# Altium PCB THEIA3000 LIGHTING BOARD V2.PcbDoc (part 2 of 2)
Units mil, origin at the board's own origin, x right, y up, seen from the top; angles counter-clockwise.
Board outline 10669.29 x 4271.65 mil, 2 copper layers (Top Layer, Bottom Layer); 147 components, 96 nets, 386 pads, 52 vias.
Unrouted connection lines stored in the file: 10.
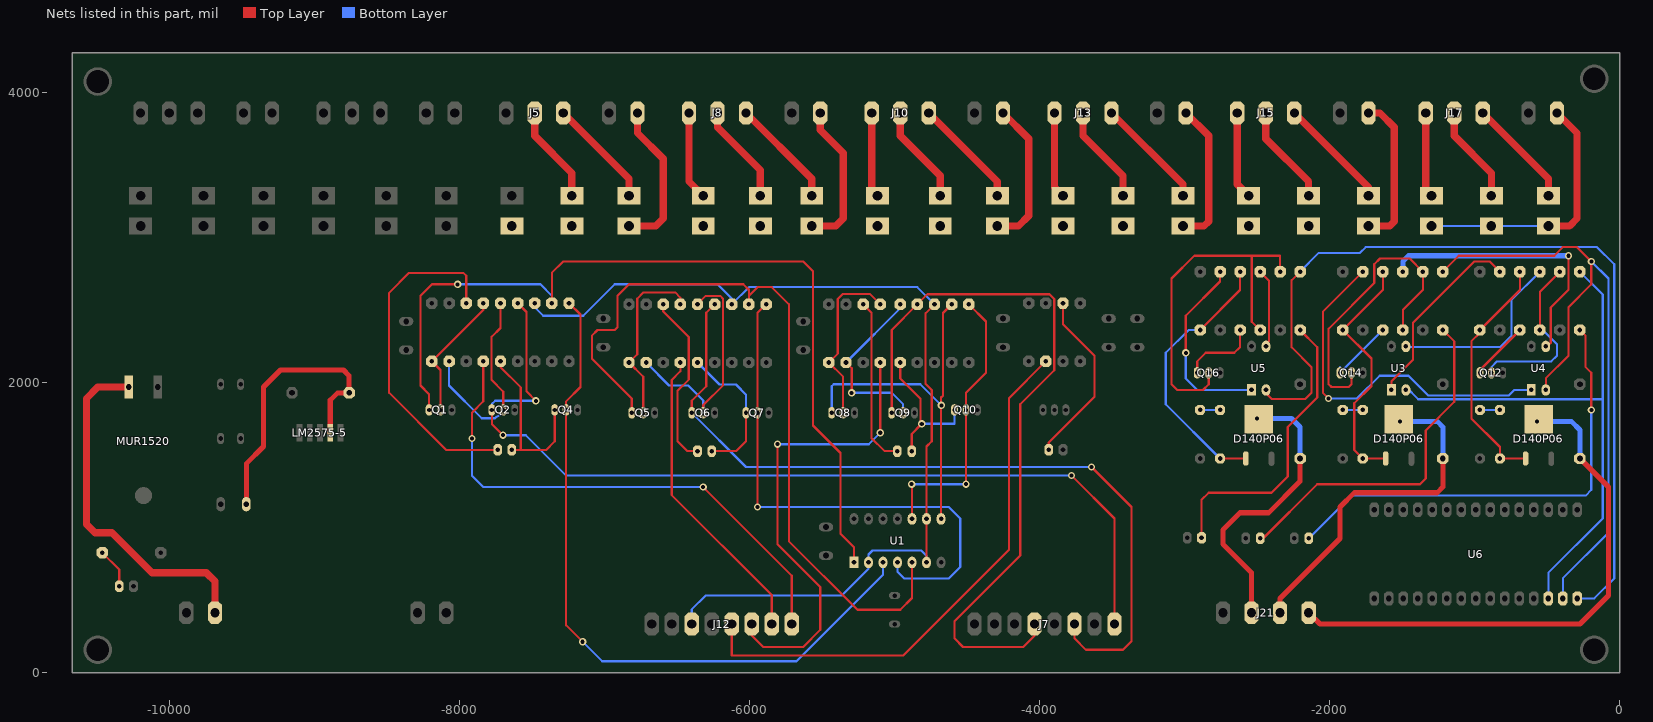
[diagram p2: the nets of this part, all layers, seen from the top]

## Via types
v1: diameter 50, hole 28, Top Layer to Bottom Layer, 52 vias

## Nets (pads, with @x,y where several pads share a name; then routed paths per layer and width w, separated by ;. In a path a pad name is that pad's centre, name@x,y a point inside that pad or via, vN(x,y) a via of type N, cw(c..) or ccw(c..) an arc to the next point about the centre after c; other vN are vias at no path point) (continued)
NetD7_3: D7.3 D8.3 D9.3 J6.2 | length 1059.2
  Top Layer w50: D9.3@-6830.71,3078.74 -6645.67,3078.74 -6594.49,3129.92 -6594.49,3543.31 -6771.65,3720.47 J6.2@-6771.65,3858.27
NetD8_1: D8.1 J5.2 | length 676.9
  Top Layer w50: J5.2@-7480.32,3858.27 -7480.32,3700.79 -7224.41,3444.88 D8.1@-7224.41,3287.4
NetD9_1: D9.1 J5.3 | length 758.4
  Top Layer w50: J5.3@-7283.47,3858.27 -6830.71,3405.51 D9.1@-6830.71,3287.4
NetD10_1: D10.1 J8.2 | length 693.2
  Top Layer w50: J8.2@-6220.47,3858.27 -6220.47,3759.84 -5925.2,3464.57 D10.1@-5925.2,3287.4
NetD10_3: D10.3 D11.3 D12.3 J9.2 | length 1031.3
  Top Layer w50: D12.3@-5570.87,3078.74 -5405.51,3078.74 -5354.33,3129.92 -5354.33,3582.68 -5511.81,3740.16 J9.2@-5511.81,3858.27
NetD11_1: D11.1 J8.1 | length 611.6
  Top Layer w50: J8.1@-6417.32,3858.27 -6417.32,3385.83 D11.1@-6318.9,3287.4
NetD12_1: D12.1 J8.3 | length 758.4
  Top Layer w50: J8.3@-6023.62,3858.27 -5570.87,3405.51 D12.1@-5570.87,3287.4
NetD13_1: D13.1 J10.2 | length 685
  Top Layer w50: J10.2@-4960.63,3858.27 -4960.63,3700.79 -4685.04,3425.2 D13.1@-4685.04,3287.4
NetD13_3: D13.3 D14.3 D15.3 J11.2 | length 1027.9
  Top Layer w50: D15.3@-4291.34,3078.74 -4145.67,3078.74 -4074.8,3149.61 -4074.8,3681.1 J11.2@-4251.97,3858.27
NetD14_1: D14.1 J10.1 | length 587.2
  Top Layer w50: J10.1@-5157.48,3858.27 -5157.48,3326.77 D14.1@-5118.11,3287.4
NetD15_1: D15.1 J10.3 | length 766.6
  Top Layer w50: J10.3@-4763.78,3858.27 -4291.34,3385.83 D15.1@-4291.34,3287.4
NetD16_1: D16.1 J13.1 | length 595.3
  Top Layer w50: J13.1@-3897.64,3858.27 -3897.64,3346.46 D16.1@-3838.58,3287.4
NetD16_3: D16.3 D17.3 D18.3 J14.2 | length 1003.5
  Top Layer w50: D18.3@-3011.81,3078.74 -2866.14,3078.74 -2834.65,3110.24 -2834.65,3700.79 J14.2@-2992.13,3858.27
NetD17_1: D17.1 J13.2 | length 685
  Top Layer w50: J13.2@-3700.79,3858.27 -3700.79,3700.79 -3425.2,3425.2 D17.1@-3425.2,3287.4
NetD18_1: D18.1 J13.3 | length 774.7
  Top Layer w50: J13.3@-3503.94,3858.27 -3011.81,3366.14 D18.1@-3011.81,3287.4
NetD19_1: D19.1 J15.2 | length 693.2
  Top Layer w50: J15.2@-2440.95,3858.27 -2440.95,3681.1 -2145.67,3385.83 D19.1@-2145.67,3287.4
NetD19_3: D19.3 D20.3 D21.3 J16.2 | length 1057.8
  Top Layer w50: D21.3@-1732.28,3078.74 -1586.61,3078.74 -1555.12,3110.24 -1555.12,3759.84 -1653.55,3858.27 J16.2@-1732.28,3858.27
NetD20_1: D20.1 J15.1 | length 603.5
  Top Layer w50: J15.1@-2637.8,3858.27 -2637.8,3366.14 D20.1@-2559.06,3287.4
NetD21_1: D21.1 J15.3 | length 782.9
  Top Layer w50: J15.3@-2244.1,3858.27 -1732.28,3346.46 D21.1@-1732.28,3287.4
NetD22_1: D22.1 J17.2 | length 676.9
  Top Layer w50: J17.2@-1141.73,3858.27 -1141.73,3700.79 -885.83,3444.88 D22.1@-885.83,3287.4
NetD22_3: D22.3 D23.3 D24.3 J18.2 | length 1810.6
  Top Layer w50: D24.3@-492.13,3078.74 -346.46,3078.74 -295.28,3129.92 -295.28,3720.47 J18.2@-433.07,3858.27
  Bottom Layer w15: D23.3@-1299.21,3078.74 D22.3@-885.83,3078.74 D24.3@-492.13,3078.74
NetD23_1: D23.1 J17.1 | length 587.2
  Top Layer w50: J17.1@-1338.58,3858.27 -1338.58,3326.77 D23.1@-1299.21,3287.4
NetD24_1: D24.1 J17.3 | length 758.4
  Top Layer w50: J17.3@-944.88,3858.27 -492.13,3405.51 D24.1@-492.13,3287.4
NetD25_3: J19.1 MUR1520.3 | length 2455.5
  Top Layer w50: MUR1520.3@-10279.53,1968.5 -10492.13,1968.5 -10570.87,1889.76 -10570.87,1023.62 -10511.81,964.57 -10393.7,964.57 -10118.11,688.98 -9744.09,688.98 -9685.04,629.92 J19.1@-9685.04,413.39
NetD26_2: 1N5819.2 330UH.2 LM2575-5.2 | length 2005.4
  Top Layer w35: 330UH.2@-9468.5,1161.42 -9468.5,1440.14 -9350.39,1558.25 -9350.39,1968.5 -9232.28,2086.61 -8799.21,2086.61 -8759.84,2047.24 1N5819.2@-8759.84,1929.13 -8838.58,1929.13 -8889.76,1877.95 LM2575-5.2@-8889.76,1653.54
NetD27_2: 1N4148.2@-964.57,1811.02 1N5245.2@-826.77,1811.02 | length 137.8
  Bottom Layer w15: 1N4148.2@-964.57,1811.02 1N5245.2@-826.77,1811.02
NetD28_2: D140P06.2@-560.04,1748.03 J21.1@-2145.67,413.39 UF4007.2@-275.59,1476.38 | length 3724.1
  Top Layer w35: J21.1@-2145.67,413.39 -2066.93,334.65 -275.59,334.65 -78.74,531.5 -78.74,1279.53 UF4007.2@-275.59,1476.38
  Bottom Layer w35: v1(-570.87,1732.28) -334.65,1732.28 -275.59,1673.23 UF4007.2@-275.59,1476.38
NetD29_2: 1N4148.2@-1909.45,1811.02 1N5245.2@-1771.65,1811.02 | length 137.8
  Bottom Layer w15: 1N4148.2@-1909.45,1811.02 1N5245.2@-1771.65,1811.02
NetD30_2: D140P06.2@-1524.61,1748.03 J21.2@-2342.52,413.39 UF4007.2@-1220.47,1476.38 | length 2390.3
  Top Layer w35: J21.2@-2342.52,413.39 -2342.52,511.81 -1929.13,925.2 -1929.13,1141.73 -1830.71,1240.16 -1259.84,1240.16 -1220.47,1279.53 UF4007.2@-1220.47,1476.38
  Bottom Layer w35: v1(-1515.75,1732.28) -1259.84,1732.28 -1220.47,1692.91 UF4007.2@-1220.47,1476.38
NetD31_2: 1N4148.2@-2893.7,1811.02 1N5245.2@-2755.91,1811.02 | length 137.8
  Bottom Layer w15: 1N4148.2@-2893.7,1811.02 1N5245.2@-2755.91,1811.02
NetD32_2: D140P06.2@-2489.17,1748.03 J21.3 UF4007.2@-2204.72,1476.38 | length 2019.1
  Top Layer w35: J21.3@-2539.37,413.39 -2539.37,688.98 -2736.22,885.83 -2736.22,984.25 -2618.11,1102.36 -2421.26,1102.36 -2204.72,1318.9 UF4007.2@-2204.72,1476.38 UF4007.2@-2206.69,1474.41
  Bottom Layer w35: v1(-2500,1751.97) -2263.78,1751.97 -2204.72,1692.91 UF4007.2@-2204.72,1476.38
NetJ7_1: 5.6K.2@-7598.43,2547.24 J7.1 Q2.1 | length 6464.8
  Top Layer w15: Q2.1@-7775.59,1811.02 -7775.59,1714.11 v1(-7698.54,1637.06) ; 5.6K.2@-7598.43,2547.24 -7537.54,2486.36 -7537.54,1939.06 v1(-7472.54,1874.06) ; v1(-3779.53,1358.27) -3484.25,1062.99 J7.1@-3484.25,334.65
  Bottom Layer w15: Q2.1@-7775.59,1811.02 -7775.59,1852.02 -7753.54,1874.06 v1(-7472.54,1874.06) ; v1(-7698.54,1637.06) -7542.58,1637.06 -7263.78,1358.27 v1(-3779.53,1358.27)
NetJ7_3: 5.6K.2@-6240.16,2539.37 J7.3 Q6.1 | length 5616.1
  Top Layer w15: Q6.1@-6397.64,1803.15 -6397.64,1874.56 -6298.54,1973.66 -6298.54,2480.98 5.6K.2@-6240.16,2539.37 ; J7.3@-3779.53,354.33 J7.3@-3759.84,334.65 -3759.84,236.22 -3681.1,157.48 -3425.2,157.48 -3366.14,216.54 -3366.14,1141.73 v1(-3641.73,1417.32)
  Bottom Layer w15: Q6.1@-6397.64,1803.15 Q6.1@-6397.64,1791.34 -6023.62,1417.32 v1(-3641.73,1417.32)
NetJ7_5: 5.6K.2@-4842.52,2539.37 J7.5 Q9.1 | length 5106.9
  Top Layer w15: Q9.1@-5019.69,1803.15 -5019.69,2362.2 5.6K.2@-4842.52,2539.37 -4773.83,2608.06 -3931.54,2608.06 -3899.54,2576.06 -3899.54,2084.71 -4133.86,1850.39 -4133.86,807.09 -4586.61,354.33 -4586.61,236.22 -4527.56,177.17 -4112.24,177.17 -4035.43,253.97 J7.5@-4035.43,334.65
NetJ12_1: 220.1@-7834.65,2145.67 J12.1 | length 3672.3
  Top Layer w15: v1(-7913.39,1614.17) -7913.39,1791.34 -7834.65,1870.08 220.1@-7834.65,2145.67 ; v1@-6319.45,1278.97 -5708.66,668.18 J12.1@-5708.66,334.65
  Bottom Layer w15: v1(-7913.39,1614.17) -7913.39,1358.27 -7834.65,1279.53 v1(-6318.9,1279.53) ; v1(-6318.9,1279.53) -6299.21,1259.87
NetJ12_2: 220.1@-6476.38,2137.8 J12.2 | length 2113
  Top Layer w15: 220.1@-6476.38,2137.8 -6476.38,2076.85 -6535.43,2017.8 -6535.43,1223.95 -5846.46,534.98 J12.2@-5846.46,334.65
NetJ12_3: 220.1@-5098.43,2137.8 J12.3 | length 3260.1
  Top Layer w15: J12.3@-5984.25,334.65 -5984.25,255.9 -5905.51,177.17 -5629.92,177.17 -5511.81,295.28 -5511.81,590.55 -5807.09,885.83 v1(-5807.09,1574.8) ; v1(-5098.43,1653.54) -5098.43,1777.95 220.1@-5098.43,2137.8
  Bottom Layer w15: v1(-5807.09,1574.8) -5177.17,1574.8 v1(-5098.43,1653.54)
NetJ12_4: 220.1@-3956.69,2145.67 J12.4 | length 3833.1
  Top Layer w15: J12.4@-6122.05,334.65 -6122.05,118.11 -4940.5,118.11 -4211.54,847.06 -4211.54,1890.82 220.1@-3956.69,2145.67
NetJ12_6: 100K.2 J12.6 U1.2 U1.6 U1.9 | length 6918.3
  Top Layer w15: U1.6@-4779.53,759.84 U1.9@-4779.53,1059.84 -4779.53,1559.06 -4744.09,1594.49 -4744.09,1948.82 -4785.54,1990.27 -4785.54,2478.24 100K.2@-4724.41,2539.37
  Bottom Layer w15: 100K.2@-7480.32,2547.24 -7480.32,2519.69 -7421.26,2460.63 -7145.67,2460.63 -6929.13,2677.17 -6220.47,2677.17 -6122.05,2578.74 100K.2@-6122.05,2539.37 -6003.94,2657.48 -4842.52,2657.48 100K.2@-4724.41,2539.37 ; J12.6@-6397.64,334.65 -6397.64,436.06 -6302.2,531.5 -5364.09,531.5 -5179.53,716.06 U1.2@-5179.53,759.84 -5179.53,814.22 -5152.03,841.72 -4815.18,841.72 -4779.53,806.06 U1.6@-4779.53,759.84
NetLED1_A: 220.2@-7952.76,2547.24 "STROBE OUT1.A" | length 2386
  Top Layer w15: 220.2@-7952.76,2547.24 -7952.76,2736.22 -7972.44,2755.91 -8346.46,2755.91 -8484.25,2618.11 -8484.25,1928.77 -8090.91,1535.43 -7736.22,1535.43
NetLED1_K: 220.1@-7716.54,2145.67 "STROBE OUT1.K" Q4.1 | length 1264.5
  Top Layer w15: 220.1@-7716.54,2145.67 -7716.54,2106.3 -7576.54,1966.31 -7576.54,1537.63 -7578.74,1535.43 -7637.8,1535.43 -7401.57,1535.43 -7342.52,1594.49 Q4.1@-7342.52,1811.02
NetLED2_A: 2.2K.2 "HW TRIG OUT.A" | length 1232
  Top Layer w15: -3937.01,1535.43 -3937.01,1586.14 -3622.05,1901.1 -3622.05,2185.04 -3838.58,2401.58 2.2K.2@-3838.58,2547.24
NetLED3_A: 220.2@-6594.49,2539.37 "STROBE OUT2.A" | length 1215.4
  Top Layer w15: 220.2@-6594.49,2539.37 -6594.49,2489.75 -6418.54,2313.8 -6418.54,2020.06 -6496.06,1942.54 -6496.06,1594.49 -6429.13,1527.56 -6358.27,1527.56
NetLED3_K: 220.1@-6358.27,2137.8 "STROBE OUT2.K" Q7.1 | length 1011.8
  Top Layer w15: -6259.84,1527.56 -6259.84,1527.06 -6092.62,1527.06 -6023.62,1596.06 Q7.1@-6023.62,1803.15
  Bottom Layer w15: 220.1@-6358.27,2137.8 -6206.54,1986.06 -6093.54,1986.06 -6023.62,1916.14 Q7.1@-6023.62,1803.15
NetLED4_A: 220.2@-5216.54,2539.37 "STROBE OUT3.A" | length 1162.3
  Top Layer w15: 220.2@-5216.54,2539.37 -5159.54,2482.38 -5159.54,1618.06 -5068.54,1527.06 -4980.32,1527.06 -4980.32,1527.56
NetLED4_K: 220.1@-4960.63,2137.8 "STROBE OUT3.K" Q10.1 | length 1105.8
  Top Layer w15: 220.1@-4960.63,2137.8 -4960.63,2027.56 -4820.54,1887.47 -4820.54,1707.06 -4881.89,1645.72 ; -4881.89,1527.56 -4881.89,1645.72 ; v1(-4812.54,1715.06) -4881.89,1645.72
  Bottom Layer w15: v1(-4812.54,1715.06) -4812.54,1716.06 -4586.61,1716.06 Q10.1@-4586.61,1803.15
NetLED5_A: 680.2@-10460.63,826.77 LED5.A | length 279.4
  Top Layer w15: 680.2@-10460.63,826.77 -10344.49,710.63 LED5.A@-10344.49,595.47
NetLED6_K: 330.1@-275.59,2362.2 RED.K | length 3231.2
  Top Layer w15: 330.1@-275.59,2362.2 -236.22,2322.83 -236.22,2106.3 -196.85,2066.93 v1@-196.85,1802.27
  Bottom Layer w15: RED.K@-2145.67,925.2 -1850.39,1220.47 -236.22,1220.47 -196.85,1259.84 v1(-196.85,1811.02)
NetLED7_K: 330.1@-1220.47,2362.2 GRN.K | length 2450.7
  Top Layer w15: GRN.K@-2480.31,925.2 -2460.63,925.2 -2086.61,1299.21 -1377.95,1299.21 -1338.58,1338.58 -1338.58,1669.76 -1141.73,1866.61 -1141.73,2283.46 330.1@-1220.47,2362.2
NetLED8_K: 330.1@-2204.72,2362.2 YEL.K | length 2064.9
  Top Layer w15: YEL.K@-2883.86,930.12 -2883.86,1190.95 -2834.65,1240.16 -2401.57,1240.16 -2289.84,1351.89 -2289.84,1692.91 -2086.61,1896.14 -2086.61,2244.09 330.1@-2204.72,2362.2
NetQ1_2: 5.6K.1@-8188.98,2145.67 220.2@-7834.65,2547.24 Q1.2 | length 907.5
  Top Layer w15: Q1.2@-8129.92,1811.02 -8129.92,2086.61 5.6K.1@-8188.98,2145.67 -7834.65,2500 220.2@-7834.65,2547.24
NetQ1_3: 5.6K.2@-7362.21,2547.24 Q1.1 U1.1 | length 6027.3
  Top Layer w15: Q1.1@-8208.66,1811.02 -8208.66,1920.18 -8267.72,1979.24 -8267.72,2598.43 -8188.98,2677.17 v1(-8011.81,2677.17) ; 5.6K.2@-7362.21,2547.24 -7362.21,2755.9 -7283.46,2834.65 -5629.92,2834.65 -5562.54,2767.27 -5562.54,1704.28 -5372.54,1514.28 -5372.54,957.08 -5279.53,864.06 U1.1@-5279.53,759.84
  Bottom Layer w15: v1(-8011.81,2677.17) -7440.94,2677.17 -7362.21,2598.43 5.6K.2@-7362.21,2547.24
NetQ2_2: 5.6K.1@-8070.87,2145.67 220.2@-7716.54,2547.24 Q2.2 | length 1460.3
  Top Layer w15: 220.2@-7716.54,2547.24 -7716.54,2376.07 -7777.54,2315.06 -7777.54,2017.76 -7696.85,1937.06 Q2.2@-7696.85,1811.02
  Bottom Layer w15: 5.6K.1@-8070.87,2145.67 -8070.87,1979.06 -7845.95,1754.15 -7755.46,1754.15 -7696.85,1789.06 Q2.2@-7696.85,1811.02
NetQ4_2: 47K.2@-7244.1,2547.24 Q4.2 U1.3 | length 4912.3
  Top Layer w15: 47K.2@-7244.1,2547.24 -7165.35,2468.5 -7165.35,1968.5 -7263.78,1870.08 Q4.2@-7263.78,1811.02 -7263.78,327.3 v1(-7149.54,213.06)
  Bottom Layer w15: v1(-7149.54,213.06) -7015.22,78.74 -5675.91,78.74 -5079.53,675.13 U1.3@-5079.53,759.84
NetQ5_2: 5.6K.1@-6830.71,2137.8 220.2@-6476.38,2539.37 Q5.2 | length 1215.1
  Top Layer w15: Q5.2@-6732.28,1803.15 -6732.28,2039.37 5.6K.1@-6830.71,2137.8 -6773.54,2194.96 -6773.54,2578.06 -6730.37,2621.24 -6512.62,2621.24 -6476.38,2585 220.2@-6476.38,2539.37
NetQ5_3: 5.6K.2@-6003.94,2539.37 Q5.1 U1.5 | length 5411.5
  Top Layer w15: Q5.1@-6811.02,1803.15 -6811.02,1889.76 -7086.61,2165.35 -7086.61,2322.83 -7047.24,2362.2 -6929.13,2362.2 -6909.45,2381.89 -6909.45,2598.43 -6830.71,2677.17 -6043.31,2677.17 -6003.94,2637.8 -6003.94,2598.42 ; 5.6K.2@-6003.94,2539.37 -6003.94,2598.42 ; U1.5@-4879.53,759.84 -4879.53,514.17 -4960.63,433.07 -5255.91,433.07 -5728.35,905.51 -5728.35,2539.37 -5846.46,2657.48 -5944.88,2657.48 -6003.94,2598.42
NetQ6_2: 5.6K.1@-6712.64,2137.79 220.2@-6358.27,2539.37 Q6.2 | length 1614.2
  Top Layer w15: 220.2@-6358.27,2539.37 -6300.57,2597.06 -6202.54,2597.06 -6181.54,2576.06 -6181.54,1982.06 -6318.9,1844.71 Q6.2@-6318.9,1803.15
  Bottom Layer w15: 5.6K.1@-6712.64,2137.79 -6554.41,1979.56 -6422.4,1979.56 -6318.9,1876.06 Q6.2@-6318.9,1803.15
NetQ7_2: 47K.2@-5885.83,2539.37 Q7.2 U1.4 | length 3736
  Top Layer w15: v1(-5944.88,1141.73) -5944.88,2480.32 47K.2@-5885.83,2539.37
  Bottom Layer w15: v1(-5944.88,1141.73) -4625.98,1141.73 -4547.24,1062.99 -4547.24,728.35 -4626.53,649.06 -4933.54,649.06 -4979.53,695.05 U1.4@-4979.53,759.84
NetQ8_2: 5.6K.1@-5452.76,2137.8 220.2@-5098.43,2539.37 Q8.2 | length 1174.7
  Top Layer w15: Q8.2@-5354.33,1803.15 -5354.33,2039.37 5.6K.1@-5452.76,2137.8 -5391.54,2199.01 -5391.54,2576.06 -5358.54,2609.06 -5168.12,2609.06 220.2@-5098.43,2539.37
NetQ8_3: 5.6K.2@-4606.3,2539.37 Q8.1 U1.8 | length 2505.3
  Top Layer w15: U1.8@-4679.53,1059.84 v1@-4679.53,1841.08 ; v1(-4677.54,1843.06) v1@-4679.53,1841.08 ; 5.6K.2@-4606.3,2539.37 -4666.54,2479.13 -4666.54,1909.06 -4679.53,1896.08 v1@-4679.53,1841.08
  Bottom Layer w15: Q8.1@-5433.07,1803.15 -5433.07,1974.54 -5419.42,1988.19 -4822.67,1988.19 v1(-4677.54,1843.06)
NetQ9_2: 5.6K.1@-5334.65,2137.8 220.2@-4960.63,2539.37 Q9.2 | length 1227.1
  Top Layer w15: 5.6K.1@-5334.65,2137.8 -5295.28,2098.43 v1(-5295.28,1929.13)
  Bottom Layer w15: 5.6K.1@-5334.65,2137.8 220.2@-4933.07,2539.37 ; v1(-5295.28,1929.13) -5019.68,1929.13 -4940.95,1850.39 Q9.2@-4940.95,1803.15
NetQ10_2: 47K.2@-4488.21,2539.37 Q10.2 U1.10 | length 1966.7
  Top Layer w15: v1(-4881.89,1299.21) -4872.05,1289.37 -4879.53,1281.89 U1.10@-4879.53,1059.84 ; v1(-4507.87,1299.21) -4507.87,1929.13 -4370.08,2066.93 -4370.08,2421.23 47K.2@-4488.21,2539.37
  Bottom Layer w15: v1(-4881.89,1299.21) v1(-4507.87,1299.21)
NetQ11_1: 1N5245.1@-826.77,1476.38 4.7K.1@-964.57,2362.2 680.2@-688.98,2763.78 D140P06.1@-649.61,1476.38 | length 1665
  Top Layer w15: 4.7K.1@-964.57,2342.52 -1023.62,2283.46 -1023.62,1751.97 -826.77,1555.12 1N5245.1@-826.77,1476.38 D140P06.1@-649.61,1476.38 ; 4.7K.1@-964.57,2362.2 -688.98,2637.8 680.2@-688.98,2763.78
NetQ12_1: 4.7K.1@-551.18,2362.2 22K.2@-413.39,2763.78 Q12.2 | length 1221
  Top Layer w15: 4.7K.1@-551.18,2362.2 -551.18,2625.98 22K.2@-413.39,2763.78
  Bottom Layer w15: Q12.2@-885.83,2066.93 -885.83,2106.3 -846.46,2145.67 -472.44,2145.67 -433.07,2185.04 -433.07,2263.78 -531.5,2362.2 4.7K.1@-551.18,2362.2
NetQ12_2: 680.1@-688.98,2362.2 Q12.1 | length 389.7
  Top Layer w15: Q12.1@-964.57,2086.61 680.1@-688.98,2362.2
NetQ13_1: 1N5245.1@-1771.65,1476.38 4.7K.1@-1909.45,2362.2 680.2@-1633.86,2763.78 D140P06.1@-1614.17,1476.38 | length 1714
  Top Layer w15: 680.2@-1633.86,2763.78 -1633.86,2637.8 4.7K.1@-1909.45,2362.2 -1712.6,2165.35 -1712.6,1975.96 -1830.71,1857.85 -1830.71,1535.43 1N5245.1@-1771.65,1476.38 D140P06.1@-1614.17,1476.38
NetQ14_1: 4.7K.1@-1496.06,2362.2 22K.2@-1358.27,2763.78 Q14.2 | length 2056.9
  Top Layer w15: Q14.2@-1850.39,2066.93 -1850.39,1988.19 -1870.08,1968.5 -1988.19,1968.5 -2007.87,1988.19 -2007.87,2371.27 -1692.91,2686.23 -1692.91,2814.96 -1653.54,2854.33 -1448.82,2854.33 22K.2@-1358.27,2763.78 -1358.27,2637.8 -1496.06,2500 4.7K.1@-1496.06,2362.2
NetQ14_2: 680.1@-1633.86,2362.2 Q14.1 | length 457
  Bottom Layer w15: Q14.1@-1929.13,2106.3 Q14.1@-1929.13,2066.93 680.1@-1633.86,2362.2
NetQ15_1: 1N5245.1@-2755.91,1476.38 4.7K.1@-2893.7,2362.2 680.2@-2618.11,2763.78 D140P06.1@-2578.74,1476.38 | length 1877.6
  Top Layer w15: 4.7K.1@-2893.7,2362.2 -2618.11,2637.8 680.2@-2618.11,2763.78 ; 1N5245.1@-2755.91,1476.38 D140P06.1@-2578.74,1476.38
  Bottom Layer w15: 4.7K.1@-2893.7,2362.2 -2972.44,2362.2 -3129.92,2204.72 -3129.92,1850.39 1N5245.1@-2755.91,1476.38
NetQ16_1: 4.7K.1@-2480.32,2362.2 22K.2@-2342.52,2763.78 Q16.2 | length 2551.2
  Top Layer w15: Q16.2@-2834.65,2066.93 -2834.65,1988.19 -2874.02,1948.82 -3051.18,1948.82 -3090.55,1988.19 -3090.55,2716.54 -2933.07,2874.02 -2342.52,2874.02 22K.2@-2342.52,2763.78 ; -2537.54,2870.6 -2537.54,2419.43 4.7K.1@-2480.32,2362.2
NetQ16_2: 680.1@-2618.11,2362.2 Q16.1 | length 532.9
  Top Layer w15: Q16.1@-2913.39,2066.93 -2913.39,2145.67 -2854.33,2204.72 -2657.48,2204.72 -2618.11,2244.1 680.1@-2618.11,2362.2
NetR34_2: 330.2@-826.77,2763.78 U3.1 | length 1309.1
  Top Layer w15: U3.1@-1574.8,1968.5 -1574.8,2007.87 -1426.54,2156.13 -1426.54,2412.04 -1003.94,2834.65 -897.64,2834.65 330.2@-826.77,2763.78
NetR36_2: 4.7K.2@-551.18,2763.78 U3.3 | length 1306.3
  Bottom Layer w15: U3.3@-1474.8,2268.5 -1474.8,2244.09 -826.77,2244.09 -748.03,2322.83 -748.03,2566.93 4.7K.2@-551.18,2763.78
NetR38_2: 330.2@-275.59,2763.78 U3.2 U6.14 | length 3864.6
  Bottom Layer w15: U3.2@-1474.8,1968.5 -1474.8,1968.97 -1390.28,1884.45 -118.11,1884.45 ; U6.14@-492.91,511.81 -492.91,688.19 -118.11,1062.99 -118.11,2606.3 330.2@-275.59,2763.78
NetR40_2: 330.2@-1771.65,2763.78 U4.1 | length 2548.9
  Top Layer w15: v1(-2007.87,1889.76) -2047.24,1929.13 -2047.24,2488.19 330.2@-1771.65,2763.78
  Bottom Layer w15: v1(-2007.87,1889.76) -1813.75,1889.76 -1656.27,2047.24 -1456.69,2047.24 -1318.9,1909.45 -767.72,1909.45 -728.35,1948.82 -629.92,1948.82 U4.1@-610.24,1968.5
NetR42_2: 4.7K.2@-1496.06,2763.78 U4.3 | length 1916.5
  Top Layer w15: U4.3@-510.24,2268.5 -480.33,2268.5 -476.54,2272.29 -476.54,2516.6 -354.33,2638.81 v1(-354.33,2874.02)
  Bottom Layer w35: 4.7K.2@-1496.06,2763.78 -1496.06,2834.65 -1456.69,2874.02 v1(-354.33,2874.02)
NetR44_2: 330.2@-1220.47,2763.78 U4.2 U6.15 | length 4652
  Top Layer w15: 330.2@-1220.47,2763.78 -1110.23,2874.02 -452.76,2874.02 -393.7,2933.07 -295.28,2933.07 v1(-196.85,2834.65) -196.85,2677.17 -354.33,2519.69 -354.33,2185.04 -510.24,2029.13 U4.2@-510.24,1948.82
  Bottom Layer w15: U6.15@-392.91,511.81 -392.91,650.39 -78.74,964.57 -78.74,2716.54 v1(-196.85,2834.65)
NetR46_2: 330.2@-2755.91,2763.78 U5.1 | length 1367
  Top Layer w15: v1(-2992.13,2204.72) -2992.13,2263.78 ; v1@-2992.13,2224.41 -2992.13,2460.63 -2755.91,2696.85 330.2@-2755.91,2763.78
  Bottom Layer w15: v1(-2992.13,2204.72) -2992.13,2027.56 -2913.39,1948.82 -2559.05,1948.82 U5.1@-2539.37,1968.5
NetR48_2: 4.7K.2@-2480.32,2763.78 U5.3 | length 547.5
  Top Layer w15: 4.7K.2@-2480.32,2763.78 -2418.54,2702.01 -2418.54,2286.18 U5.3@-2452.33,2257.5
NetR50_2: 330.2@-2204.72,2763.78 U5.2 U6.16 | length 6062.9
  Top Layer w15: U5.2@-2439.37,1968.5 -2439.37,1927.56 -2398.78,1886.97 -2168.15,1886.97 -2125.98,1929.13 -2125.98,2106.3 -2262.54,2242.86 ; -2262.54,2244.09 -2262.54,2705.96 330.2@-2204.72,2763.78
  Bottom Layer w15: 330.2@-2204.72,2763.78 -2074.8,2893.7 -1791.34,2893.7 -1751.97,2933.07 -157.48,2933.07 -39.37,2814.96 -39.37,649.61 -177.17,511.81 U6.16@-292.91,511.81
pads on no net: J12.8 U1.11 U1.12 U1.13 U6.1 U6.2 U6.3V3 U6.9 U6.10 U6.11 U6.12 U6.13 U6.17 U6.19 U6.21 U6.22 U6.23 U6.24 U6.25 U6.26 U6.27 U6.28 U6.29 U6.30 U6.31 U6.32 U6.Vin
copper on no net: | length 4982.9
  Top Layer w15: -9350.39,3078.74 -9263.54,3078.74 -9253.54,3088.74
  Bottom Layer w15: -8937.01,3078.74 -8503.94,3078.74 -8090.55,3078.74 ; -7637.8,3078.74 -7224.41,3078.74 -6830.71,3078.74 ; -6318.9,3078.74 -5925.2,3078.74 -5570.87,3078.74 ; -5118.11,3078.74 -4685.04,3078.74 -4291.34,3078.74 ; -3838.58,3078.74 -3425.2,3078.74 -3011.81,3078.74 ; -2559.06,3078.74 -2145.67,3078.74 -1732.28,3078.74
  other v1: -9255.91,905.51 -9118.11,905.51 -8960.63,905.51 -8822.84,905.51 -8665.36,905.51 -9255.91,1043.31 -9118.11,1043.31 -8960.63,1043.31 -8822.84,1043.31 -8665.36,1043.31 -9255.91,1220.47 -8665.36,1220.47 -9255.91,1358.27 -8665.36,1358.27

## Keep-outs
Keep-Out Layer:
  the board outline again, w10

## Other copper
Top Layer:
  rectangle: -9314.96,826.77 -8586.62,1476.38
  rectangle net +24V: -10492.13,1043.31 -9862.2,1692.91
Bottom Layer:
  rectangle net NetD28_2: -669.29,1633.86 -452.76,1850.39
  rectangle net NetD32_2: -2598.43,1633.86 -2381.89,1850.39
  rectangle net NetD30_2: -1633.86,1633.86 -1417.32,1850.39
  rectangle net NetD1_3: -10295.28,2952.76 -9251.97,3149.61
  rectangle: -9035.43,2952.76 -7992.13,3149.61
  rectangle: -7755.9,2952.76 -6712.6,3149.61
  rectangle: -6456.69,2952.76 -5413.39,3149.61
  rectangle: -5216.53,2952.76 -4173.23,3149.61
  rectangle: -3956.69,2952.76 -2913.38,3149.61
  rectangle net NetD19_3: -2677.16,2992.13 -1633.86,3149.61
  rectangle net NetD22_3: -1417.32,2992.13 -374.02,3149.61
  rectangle: -9314.96,807.09 -8586.62,1476.38
  rectangle net +24V: -10531.5,1023.62 -9803.15,1712.6

## Silkscreen, mask and mechanical layers (free items; w line width, h text height)
Top Overlay:
  lines w15: -10003.94,492.13 -10003.94,637.8 ; -9787.4,492.13 -9787.4,637.8 ; -9610.24,3645.67 -9610.24,3791.34 ; -9566.93,480.32 -9566.93,625.99 ; -9389.76,3633.86 -9389.76,3779.53 ; -9173.23,3633.86 -9173.23,3779.53 ; -8405.51,492.13 -8405.51,637.8 ; -8350.39,3645.67 -8350.39,3791.34 ; -8188.97,492.13 -8188.97,637.8 ; -8129.92,3633.86 -8129.92,3779.53 ; -7968.5,480.32 -7968.5,625.99 ; -7913.39,3633.86 -7913.39,3779.53 ; -7090.55,3645.67 -7090.55,3791.34 ; -6870.08,3633.86 -6870.08,3779.53 ; -6653.54,3633.86 -6653.54,3779.53 ; -5830.71,3645.67 -5830.71,3791.34 ; -5610.24,3633.86 -5610.24,3779.53 ; -5393.7,3633.86 -5393.7,3779.53 ; -4570.87,3645.67 -4570.87,3791.34 ; -4350.39,3633.86 -4350.39,3779.53 ; -4133.86,3633.86 -4133.86,3779.53 ; -3307.09,3645.67 -3307.09,3791.34 ; -3086.62,3633.86 -3086.62,3779.53 ; -2870.08,3633.86 -2870.08,3779.53 ; -2051.18,3645.67 -2051.18,3791.34 ; -1830.71,3633.86 -1830.71,3779.53 ; -1614.17,3633.86 -1614.17,3779.53 ; -748.03,3633.86 -748.03,3779.53 ; -531.5,3633.86 -531.5,3779.53 ; -314.96,3633.86 -314.96,3779.53
  lines w20: -10393.7,2854.33 -10393.7,4271.65 ; -9114.17,2874.02 -9114.17,4291.34 ; -7854.33,2874.02 -7854.33,4291.34 ; -6594.49,2874.02 -6594.49,4291.34 ; -5334.65,2874.02 -5334.65,4291.34 ; -4074.8,2874.02 -4074.8,4291.34 ; -2814.96,2874.02 -2814.96,4291.34 ; -255.91,2854.33 -255.91,4271.65 ; -1535.43,2874.02 -1535.43,4291.34 -1535.43,2874.02
  text "THEIA3000 LIGHTING BOARD V2" at -137.8,3897.64 h100 r270
  text "+OUT L1" at -9527.56,3759.84 h50 r270
  text "-OUT L1" at -9311.02,3759.84 h50 r270
  text "+OUT L2" at -8267.72,3759.84 h50 r270
  text "-OUT L2" at -8051.18,3759.84 h50 r270
  text "+OUT L3" at -6988.19,3759.84 h50 r270
  text "-OUT L3" at -6771.65,3759.84 h50 r270
  text "+OUT L4" at -5728.35,3759.84 h50 r270
  text "-OUT L4" at -5511.81,3759.84 h50 r270
  text "+OUT L5" at -4468.5,3759.84 h50 r270
  text "-OUT L5" at -4271.65,3759.84 h50 r270
  text "+OUT L6" at -3208.66,3759.84 h50 r270
  text "-OUT L6" at -2992.13,3759.84 h50 r270
  text "+OUT L7" at -1968.5,3759.84 h50 r270
  text "-OUT L7" at -1751.97,3759.84 h50 r270
  text "+OUT L8" at -649.61,3759.84 h50 r270
  text "-OUT L8" at -452.76,3759.84 h50 r270
  text "-INL1" at -10236.22,3740.16 h50 r270
  text "-INL1" at -10019.68,3740.16 h50 r270
  text "-INL1" at -9822.83,3740.16 h50 r270
  text "-INL2" at -8976.38,3740.16 h50 r270
  text "-INL2" at -8759.84,3740.16 h50 r270
  text "-INL2" at -8562.99,3740.16 h50 r270
  text "-INL3" at -7696.85,3740.16 h50 r270
  text "-INL3" at -7480.31,3740.16 h50 r270
  text "-INL3" at -7283.46,3740.16 h50 r270
  text "-INL4" at -6437.01,3740.16 h50 r270
  text "-INL4" at -6220.47,3740.16 h50 r270
  text "-INL4" at -6023.62,3740.16 h50 r270
  text "-INL5" at -5177.17,3740.16 h50 r270
  text "-INL5" at -4980.31,3740.16 h50 r270
  text "-INL5" at -4783.46,3740.16 h50 r270
  text "-INL6" at -3917.32,3740.16 h50 r270
  text "-INL6" at -3720.47,3740.16 h50 r270
  text "-INL6" at -3503.94,3740.16 h50 r270
  text "-INL7" at -2657.48,3740.16 h50 r270
  text "-INL7" at -2460.63,3740.16 h50 r270
  text "-INL7" at -2263.78,3740.16 h50 r270
  text "-INL8" at -1358.27,3740.16 h50 r270
  text "-INL8" at -1141.73,3740.16 h50 r270
  text "-INL8" at -944.88,3740.16 h50 r270
  text "D1-D24 (MUR820G)" at -10374.02,2677.17 h70
  text "MPSA42" at -2972.44,2244.09 h60
  text "MPSA42" at -2007.87,2244.09 h60
  text "MPSA42" at -1062.99,2244.09 h60
  text "PC817" at -2519.68,2185.04 h40 r270
  text "PC817" at -1535.43,2185.04 h40 r270
  text "PC817" at -570.87,2185.04 h40 r270
  text "C557" at -8267.72,2007.87 h60
  text "C557" at -7814.96,2007.87 h60
  text "C547" at -7362.2,2007.87 h60
  text "C547" at -4625.98,2007.87 h60
  text "C557" at -3996.06,2007.87 h60
  text "C557" at -6850.39,1988.19 h60
  text "C557" at -6417.32,1988.19 h60
  text "C547" at -6062.99,1988.19 h60
  text "C557" at -5472.44,1988.19 h60
  text "C557" at -5059.06,1988.19 h60
  text "E" at -2952.76,1968.5 h60
  text "B" at -2854.33,1968.5 h60
  text "C" at -2755.91,1968.5 h60
  text "G" at -688.98,1456.69 h60
  text "D" at -590.55,1456.69 h60
  text "S" at -492.13,1456.69 h60
  text "G" at -2598.43,1437.01 h60
  text "D" at -2500,1437.01 h60
  text "S" at -2401.57,1437.01 h60
  text "G" at -1653.54,1437.01 h60
  text "D" at -1555.12,1437.01 h60
  text "S" at -1456.69,1437.01 h60
  text "GND" at -2775.59,728.35 h60 r270
  text "YEL" at -2559.05,728.35 h60 r270
  text "GRN" at -2362.2,728.35 h60 r270
  text "RED" at -2165.35,728.35 h60 r270
  text "TOWER LIGHT" at -2992.13,688.98 h60 r270
  text "GND" at -8287.4,590.55 h60 r90
  text "GND" at -9862.2,551.18 h60 r90
  text "NC" at -6653.54,511.81 h60 r90
  text "HW TRIG OUT" at -4291.34,511.81 h60 r90
  text "GND" at -6496.06,492.13 h60 r90
  text "STROBE IN" at -6358.27,492.13 h60 r90
  text "GND" at -6220.47,492.13 h60 r90
  text "DO-3" at -6082.68,492.13 h60 r90
  text "DO-2" at -5944.88,492.13 h60 r90
  text "DO-1" at -5807.09,492.13 h60 r90
  text "DO-0" at -5649.61,492.13 h60 r90
  text "GND" at -4409.45,492.13 h60 r90
  text "GND" at -4133.86,492.13 h60 r90
  text "STROBE OUT3" at -3996.06,492.13 h60 r90
  text "GND" at -3858.27,492.13 h60 r90
  text "STROBE OUT2" at -3720.47,492.13 h60 r90
  text "GND" at -3602.36,492.13 h60 r90
  text "STROBE OUT1" at -3425.2,492.13 h60 r90

## Text inside footprints (layer, text, board x,y; h text height)
100UF/50V: Top Overlay "+" at -9753.94,1958.66 h60
100UF/50V: Top Overlay "+" at -9753.94,1584.65 h60
C6: Top Overlay "+" at -5066.93,688.98 h106.3 r270
D140P06: Top Overlay "1" at -2602.36,1606.3 h39.37; Top Overlay "3" at -2409.45,1602.36 h39.37; Top Overlay "2" at -2510.83,1701.77 h39.37
D140P06: Top Overlay "1" at -1637.8,1606.3 h39.37; Top Overlay "3" at -1444.88,1602.36 h39.37; Top Overlay "2" at -1546.26,1701.77 h39.37
D140P06: Top Overlay "1" at -673.23,1606.3 h39.37; Top Overlay "3" at -480.31,1602.36 h39.37; Top Overlay "2" at -581.69,1701.77 h39.37
LM2575-5: Top Overlay "1" at -8811.02,1488.19 h60 r180; Top Overlay "5" at -9082.68,1488.19 h60 r180
MUR1520: Top Overlay "3" at -10301.18,1700.79 h60 r180; Top Overlay "1" at -10029.53,1700.79 h60 r180
Q1: Top Overlay "3" at -8082.68,1862.2 h60; Top Overlay "1" at -8212.6,1862.2 h60
Q2: Top Overlay "3" at -7649.61,1862.2 h60; Top Overlay "1" at -7779.53,1862.2 h60
Q3: Top Overlay "3" at -3850.39,1862.2 h60; Top Overlay "1" at -3980.31,1862.2 h60
Q4: Top Overlay "3" at -7216.54,1862.2 h60; Top Overlay "1" at -7346.46,1862.2 h60
Q5: Top Overlay "3" at -6685.04,1842.52 h60; Top Overlay "1" at -6814.96,1842.52 h60
Q6: Top Overlay "3" at -6271.65,1842.52 h60; Top Overlay "1" at -6401.57,1842.52 h60
Q7: Top Overlay "3" at -5897.64,1842.52 h60; Top Overlay "1" at -6027.56,1842.52 h60
Q8: Top Overlay "3" at -5307.09,1842.52 h60; Top Overlay "1" at -5437.01,1842.52 h60
Q9: Top Overlay "3" at -4893.7,1842.52 h60; Top Overlay "1" at -5023.62,1842.52 h60
Q10: Top Overlay "3" at -4460.63,1862.2 h60; Top Overlay "1" at -4590.55,1862.2 h60
Q12: Top Overlay "3" at -838.58,2118.11 h60; Top Overlay "1" at -968.5,2118.11 h60
Q14: Top Overlay "3" at -1803.15,2118.11 h60; Top Overlay "1" at -1933.07,2118.11 h60
Q16: Top Overlay "3" at -2787.4,2118.11 h60; Top Overlay "1" at -2917.32,2118.11 h60
U6: Top Overlay "+5V" at -1370.08,952.76 h39.37 r90; Top Overlay "A7" at -1275.59,988.19 h39.37 r90; Top Overlay "A6" at -1173.23,984.25 h39.37 r90; Top Overlay "A5" at -1070.87,988.19 h39.37 r90; Top Overlay "A4" at -976.38,984.25 h39.37 r90; Top Overlay "A3" at -874.02,988.19 h39.37 r90; Top Overlay "A2" at -771.65,992.13 h39.37 r90; Top Overlay "A1" at -673.23,996.06 h39.37 r90; Top Overlay "A0" at -574.8,988.19 h39.37 r90; Top Overlay "AREF" at -472.44,929.13 h39.37 r90; Top Overlay "3V3" at -370.08,968.5 h39.37 r90; Top Overlay "D13" at -271.65,968.5 h39.37 r90; Top Overlay "D12" at -267.72,570.87 h39.37 r90; Top Overlay "D11" at -370.08,570.87 h39.37 r90; Top Overlay "D10" at -464.57,574.8 h39.37 r90; Top Overlay "D9" at -566.93,574.8 h39.37 r90; Top Overlay "D8" at -673.23,574.8 h39.37 r90; Top Overlay "D7" at -771.65,570.87 h39.37 r90; Top Overlay "D6" at -870.08,570.87 h39.37 r90; Top Overlay "D5" at -972.44,574.8 h39.37 r90; Top Overlay "D4" at -1070.87,574.8 h39.37 r90; Top Overlay "D3" at -1165.35,578.74 h39.37 r90; Top Overlay "D2" at -1275.59,578.74 h39.37 r90; Top Overlay "GND" at -1370.08,566.93 h39.37 r90; Top Overlay "RST" at -1468.5,570.87 h39.37 r90; Top Overlay "RX0" at -1570.87,574.8 h39.37 r90; Top Overlay "TX1" at -1673.23,574.8 h39.37 r90; Top Overlay "L" at -1492.13,948.82 h39.37 r180; Top Overlay "PWR" at -1488.19,874.02 h39.37 r180; Top Overlay "TX" at -1480.31,799.21 h39.37 r180; Top Overlay "RX" at -1480.31,720.47 h39.37 r180; Top Overlay "RST" at -1059.06,748.03 h60 r90; Top Overlay "MEGA328" at -791.34,685.04 h43.31 r90; Top Overlay "USB" at -220.47,850.39 h60 r180; Top Overlay "RST" at -1460.63,968.5 h39.37 r90; Top Overlay "GND" at -1570.87,948.82 h39.37 r90; Top Overlay "Vin" at -1673.23,956.69 h39.37 r90; Top Overlay "1" at -1736.22,948.82 h39.37 r90